# Altium PCB PCB1.PcbDoc
Units mm, origin at the board's own origin, x right, y up, seen from the top; angles counter-clockwise.
Board outline 80 x 78 mm, 2 copper layers (Top Layer, Bottom Layer), stack 3.066 mm thick; 12 components, 3 nets, 38 pads, 0 vias.
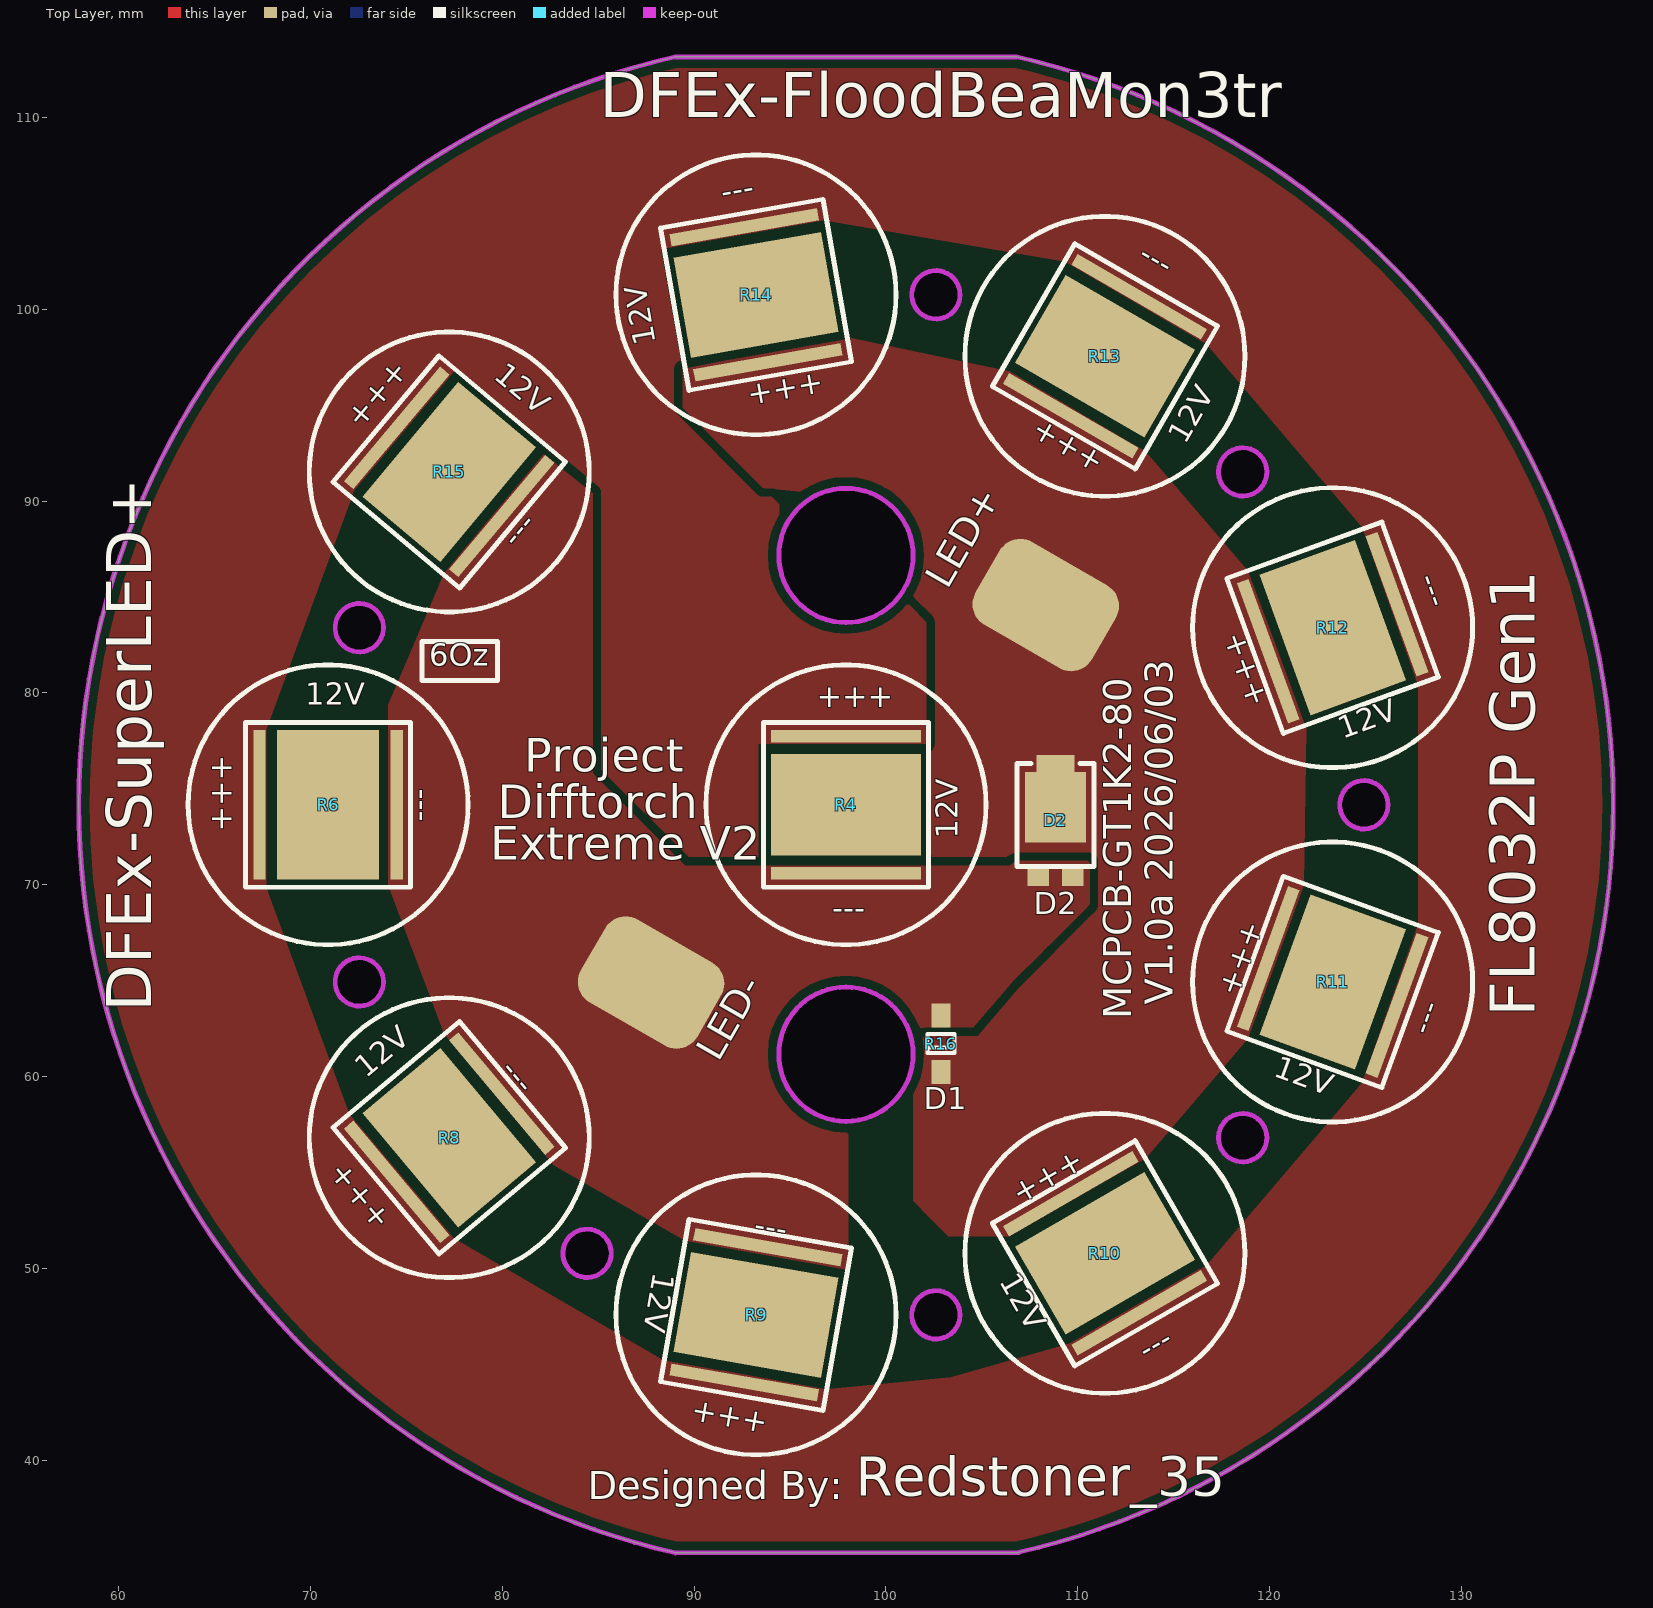
[diagram p0: Top Layer view]
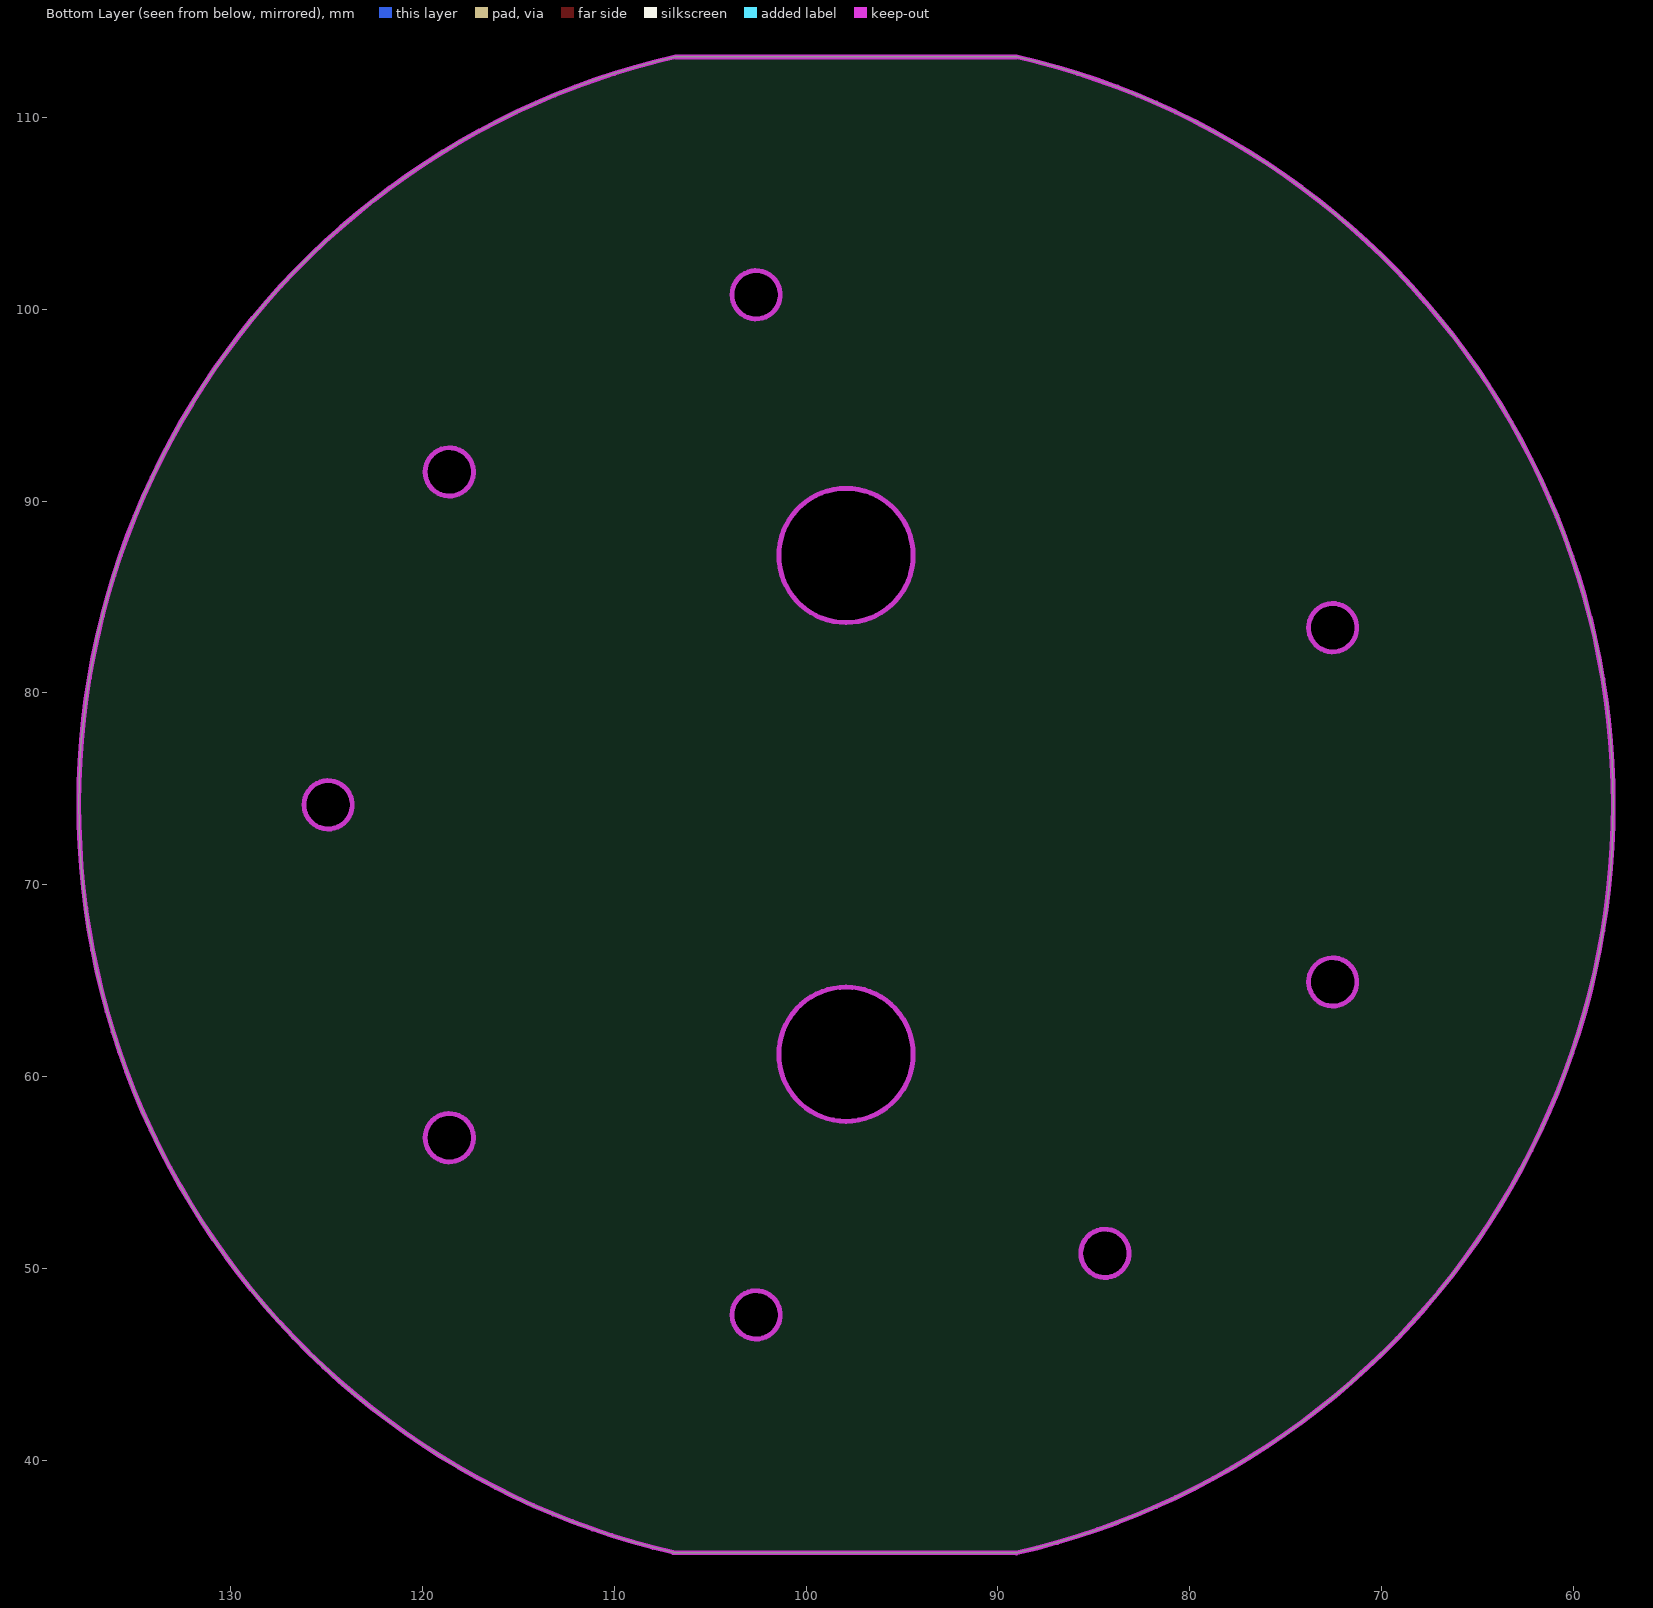
[diagram p1: Bottom Layer view, seen from below]
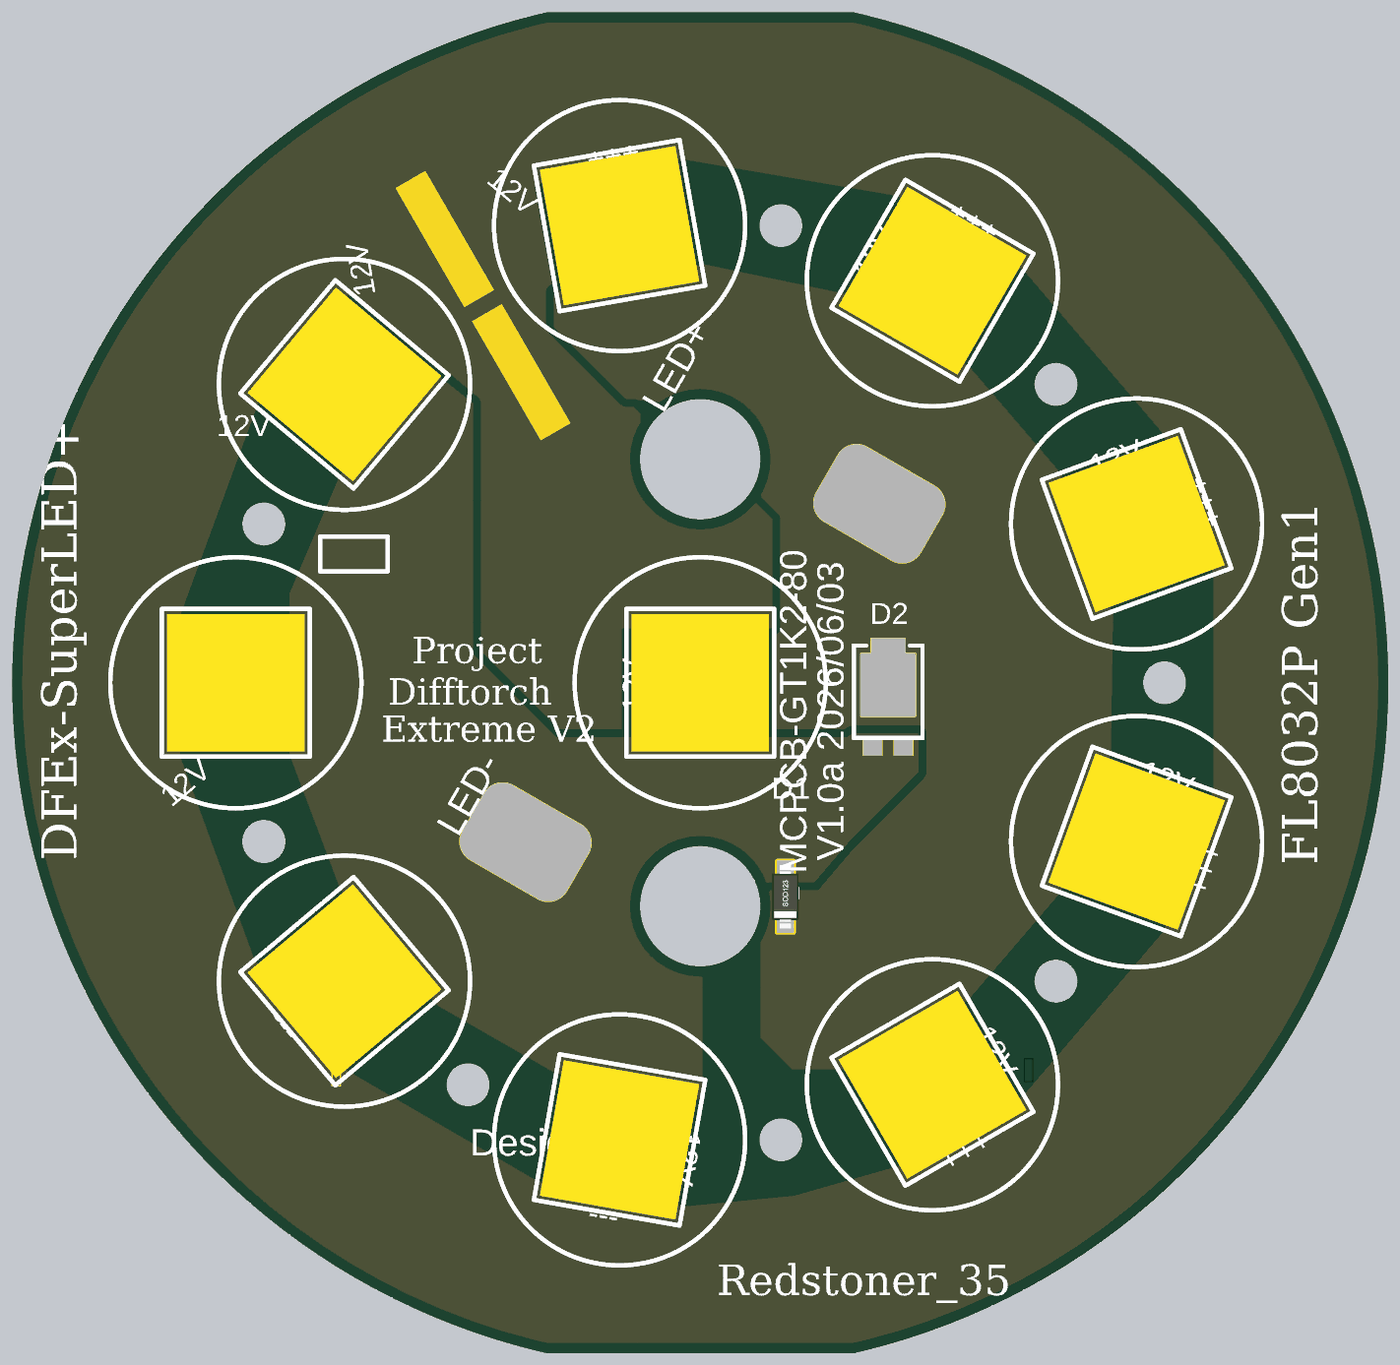
[diagram p2: 3D render of the assembled board from above, using the file's embedded part models]

## Layer stack, top to bottom
Top Solder: solder mask 0.0102, Solder Resist, Dk 3.5
Top Layer: signal copper 0.21
Dielectric 1: dielectric 2.82, FR-4, Dk 4.8
Bottom Layer: signal copper 0.0356
Bottom Solder: solder mask 0.0102, Solder Resist, Dk 3.5

## Board outline
89.025,35.169 cw(c97.919,74.168) 89.027,113.167 89.027,113.157 106.809,113.157 106.81,113.167 cw(c97.917,74.168) 106.93,35.197 106.93,35.179
cut-out: 83.167,50.785 ccw(c84.417,50.785) 84.417,49.535 ccw(c84.417,50.785) 85.667,50.785 ccw(c84.417,50.785) 84.417,52.035 ccw(c84.417,50.785)
cut-out: 101.356,47.578 ccw(c102.606,47.578) 102.606,46.328 ccw(c102.606,47.578) 103.856,47.578 ccw(c102.606,47.578) 102.606,48.828 ccw(c102.606,47.578)
cut-out: 117.35,56.813 ccw(c118.6,56.813) 118.6,55.563 ccw(c118.6,56.813) 119.85,56.813 ccw(c118.6,56.813) 118.6,58.063 ccw(c118.6,56.813)
cut-out: 123.667,74.168 ccw(c124.917,74.168) 124.917,72.918 ccw(c124.917,74.168) 126.167,74.168 ccw(c124.917,74.168) 124.917,75.418 ccw(c124.917,74.168)
cut-out: 117.35,91.523 ccw(c118.6,91.523) 118.6,90.273 ccw(c118.6,91.523) 119.85,91.523 ccw(c118.6,91.523) 118.6,92.773 ccw(c118.6,91.523)
cut-out: 101.356,100.758 ccw(c102.606,100.758) 102.606,99.508 ccw(c102.606,100.758) 103.856,100.758 ccw(c102.606,100.758) 102.606,102.008 ccw(c102.606,100.758)
cut-out: 72.545,82.153 cw(c72.545,83.403) 71.295,83.403 cw(c72.545,83.403) 72.545,84.653 cw(c72.545,83.403) 73.795,83.403 cw(c72.545,83.403)
cut-out: 94.417,87.168 ccw(c97.917,87.168) 97.917,83.668 ccw(c97.917,87.168) 101.417,87.168 ccw(c97.917,87.168) 97.917,90.668 ccw(c97.917,87.168)
cut-out: 94.417,61.168 ccw(c97.917,61.168) 97.917,57.668 ccw(c97.917,61.168) 101.417,61.168 ccw(c97.917,61.168) 97.917,64.668 ccw(c97.917,61.168)
cut-out: 71.285,64.933 ccw(c72.545,64.933) 72.545,63.673 ccw(c72.545,64.933) 73.805,64.933 ccw(c72.545,64.933) 72.545,66.193 ccw(c72.545,64.933)

## Design rules (kind name [scope] priority, off if disabled: settings)
Clearance [All] p1: gap=0.45
PolygonConnect [All] p1: connectstyle=Direct reliefconductorwidth=0.254 reliefentries=4 polygonreliefangle="90 Angle" airgapwidth=0.254
RoutingVias [All] p1: holewidth=0.711 width=1.27 viastyle="Through Hole" minholewidth=0.711 minwidth=1.27 maxholewidth=0.711 maxwidth=1.27
SolderMaskExpansion [All] p1: expansion=0.102
Width [All] p1: maxlimit=100 minlimit=0.45 preferedwidth=0.8
30 further rules are at their usual default settings.

## Components (designator, comment, footprint, x,y, rotation, side; value= is the part's Value field where it differs from the comment)
D2 "PT30L80SP" TO277 108.839,74.041 r0 top
R4 "5A 一次性慢熔" FL8032P 97.917,74.168 r90 top locked
R6 "5A 一次性慢熔" FL8032P 70.917,74.168 r0 top
R8 "5A 一次性慢熔" FL8032P 77.234,56.813 r40 top
R9 "5A 一次性慢熔" FL8032P 93.229,47.578 r80 top
R10 "5A 一次性慢熔" FL8032P 111.417,50.785 r120 top
R11 "5A 一次性慢熔" FL8032P 123.289,64.933 r160 top
R12 "5A 一次性慢熔" FL8032P 123.289,83.403 r200 top
R13 "5A 一次性慢熔" FL8032P 111.417,97.551 r240 top
R14 "5A 一次性慢熔" FL8032P 93.228,100.758 r280 top
R15 "5A 一次性慢熔" FL8032P 77.234,91.523 r320 top
R16 "5A 一次性慢熔" SOD-123 102.87,61.722 r90 top

## Footprints (in the part's own frame and the unit in brackets; to place one, negate y for a bottom-side part, rotate by r counter-clockwise, add the part's x,y. Pads: shape width x height; smd on the part's side, far side on the other; paste and mask are expansions set on the pad)
FL8032P [mm] "FL8032P 12V High Efficiency LED"
  rect 5.3x7.8 smd mask+0.03: 0(0,0)
  rect 0.65x7.8 smd mask+0.03: 1(-3.575,0) 2(3.575,0)
  silkscreen extent -4.3,-4.3 4.3,4.3, body extent -4,-4 4,4, height 0.93
SOD-123 [mm]
  rect 1.25x1 smd: 1(1.475,0) 2(-1.475,0)
  silkscreen extent -0.5,-0.7 0.5,0.7, body extent -1.85,-0.77 1.85,0.78, height 1.35
TO277 [mm]
  rect 3.2x3.7 smd mask+0.03: 1(0,0)
  rect 2x0.9 smd mask+0.03: 1(0,2.275)
  rect 1.1x0.9 smd mask+0.03: 2(-0.9,-3.65) 3(0.9,-3.65)
  silkscreen extent -2,-3.09 2,2.29, body extent -2.03,-3.05 2.03,2.29, height 1.1

## Free pads (board coordinates)
  rrect50% 5x7 smd rot 60 mask+0.03: 4(87.757,64.897) 4(108.331,84.582)

## Nets (pads, with @x,y where several pads share a name; then routed paths per layer and width w, separated by ;. In a path a pad name is that pad's centre, name@x,y a point inside that pad or via, vN(x,y) a via of type N, cw(c..) or ccw(c..) an arc to the next point about the centre after c; other vN are vias at no path point)
12V: R4.2 R6.1 R8.1 R9.1 R10.1 R11.1 R12.1 R13.1 R14.1 R15.1
24V: D2.1 pad.4@108.331,84.582 R10.2 R11.2 R12.2 R13.2 R14.2 R16.2
GND: D2.2 D2.3 pad.4@87.757,64.897 R4.1 R6.2 R8.2 R9.2 R15.2 R16.1
pads on no net: R4.0 R6.0 R8.0 R9.0 R10.0 R11.0 R12.0 R13.0 R14.0 R15.0

## Polygon pours and split planes (outlines as drawn)
24V on Top Layer "Component Side-No Net 1" (solid, remove dead copper, pour order 20): 93.644,90.678 99.981,90.008 100.838,83.82 102.616,69.596 108.585,69.342 106.172,92.837 101.219,95.885
GND on Top Layer "Component Side-No Net 1" (solid, remove dead copper, pour order 18): 96.901,66.548 109.601,66.675 108.585,60.579 94.615,61.722
12V on Top Layer "Component Side-No Net 1" (solid, remove dead copper, pour order 16): 109.601,46.101 103.378,44.323 96.866,43.694 91.313,44.704 90.805,35.179 117.475,35.052 116.459,50.038
12V on Top Layer "Component Side-No Net 1" (solid, remove dead copper, pour order 14): 109.601,46.101 116.713,50.165 124.841,59.69 127.762,67.945 127.762,80.391 124.841,88.646 116.713,98.171 109.347,102.489 96.739,104.642 92.837,108.839 94.742,117.094 126.492,121.793 148.082,108.331 144.018,67.056 131.572,34.671 109.601,29.845
12V on Top Layer "Component Side-No Net 1" (solid, remove dead copper, pour order 12): 72.263,90.551 67.691,78.105 67.691,69.85 72.009,58.039 77.47,51.562 88.392,45.212 96.901,43.688 96.901,35.179 72.517,35.433 59.944,50.8 55.372,68.199 54.356,92.583 59.055,105.537 76.327,100.965
12V on Top Layer "Component Side-No Net 1" (solid, remove dead copper, pour order 10): 102.108,77.343 102.108,83.693 99.182,86.619 94.449,86.619 94.449,89.828 89.408,94.869 89.408,96.774 88.265,103.124 96.774,104.648 96.774,115.443 81.407,114.681 71.247,105.156 64.008,99.568 63.373,98.552 63.881,97.282 64.77,96.647 72.263,90.551 77.597,96.901 83.439,92.075 84.963,90.805 84.709,75.819 89.535,70.993 93.345,70.993 93.345,77.343
24V on Top Layer "Component Side-No Net 1" (solid, pour order 8): 106.426,51.689 103.251,51.689 102.235,52.705 101.425,53.515 101.425,62.103 104.775,62.103 110.617,68.961 110.744,69.088 110.744,71.501 103.124,71.501 102.997,71.628 102.997,79.756 102.997,88.773 101.092,90.678 93.599,90.678 89.408,94.869 89.408,96.901 97.917,98.552 106.426,96.774 113.538,92.583 118.872,86.36 121.92,78.232 121.793,69.977 118.872,61.976 113.538,55.753
GND on Top Layer "Component Side-No Net 1" (solid, pour order 6): 98.298,70.993 106.426,70.993 106.807,71.247 110.617,71.247 110.617,68.961 110.363,68.707 104.902,63.246 101.425,63.246
GND on Top Layer "Component Side-No Net 1" (solid, pour order 4): 74.041,77.216 74.041,79.375 76.962,86.233 82.169,92.456 84.709,90.424 84.709,89.154 84.709,78.232 84.709,75.819 84.709,71.501 84.455,71.247 83.185,69.977 74.041,69.977
GND on Top Layer "Component Side-No Net 1" (solid, pour order 2): 98.044,49.911 98.044,57.531 98.192,57.679 97.917,57.953 97.917,64.679 98.897,64.679 100.584,62.992 100.838,63.246 101.981,63.246 101.981,70.866 101.854,70.993 95.377,70.993 89.535,70.993 83.312,77.216 82.423,78.105 74.041,78.105 74.041,69.977 76.962,62.23 82.677,55.372 89.535,51.435

## Keep-outs
Keep-Out Layer:
  circle w0.254: c102.606,100.758 r1.26
  circle w0.254: c118.6,91.523 r1.26
  circle w0.254: c124.917,74.168 r1.26
  circle w0.254: c118.6,56.813 r1.26
  circle w0.254: c102.606,47.578 r1.26
  circle w0.254: c84.417,50.785 r1.26
  circle w0.254: c72.545,64.933 r1.26
  circle w0.254: c72.545,83.403 r1.26
  circle w0.254: c97.917,61.168 r3.5
  circle w0.254: c97.917,87.168 r3.5
  lines w0.254: 89.025,35.169 cw(c97.919,74.168) 89.027,113.167 ; 89.025,35.179 106.93,35.179 ; 89.027,113.157 106.809,113.157 ; 106.81,113.167 cw(c97.917,74.168) 106.93,35.197

## Silkscreen, mask and mechanical layers (free items; w line width, h text height)
Top Overlay:
  circle w0.254: c97.917,74.168 r7.3
  circle w0.254: c77.234,91.523 r7.3
  circle w0.254: c93.229,100.758 r7.3
  circle w0.254: c111.417,97.551 r7.3
  circle w0.254: c123.289,83.403 r7.3
  circle w0.254: c123.289,64.933 r7.3
  circle w0.254: c111.417,50.785 r7.3
  circle w0.254: c93.228,47.578 r7.3
  circle w0.254: c77.234,56.813 r7.3
  circle w0.254: c70.917,74.168 r7.3
  circle w0.254: c70.917,74.168 r7.3
  lines w0.254: 75.819,80.645 79.756,80.645 79.756,82.677 75.819,82.677 75.819,80.645
  text "DFEx-FloodBeaMon3tr" at 85.09,109.22 h4
  text "---" at 91.567,105.156 h2 r10
  text "---" at 112.903,102.235 h2 r330
  text "12V" at 88.392,98.298 h2 r100
  text "12V" at 79.248,96.139 h2 r320
  text "+++" at 92.964,94.615 h2 r10
  text "+++" at 72.898,93.472 h2 r50
  text "+++" at 107.315,93.091 h2 r330
  text "12V" at 115.951,92.71 h2 r60
  text "---" at 81.026,87.249 h2 r50
  text "---" at 127.381,85.852 h2 r290
  text "LED+" at 103.632,85.09 h2.5 r60
  text "+++" at 117.221,82.804 h2 r290
  text "6Oz" at 76.2,81.026 h2
  text "12V" at 69.723,78.994 h2
  text "+++" at 96.393,78.867 h2
  text "12V" at 123.952,77.216 h2 r20
  text "Project" at 81.153,75.311 h3
  text "---" at 76.581,73.279 h2 r90
  text "Difftorch" at 79.756,72.898 h3
  text "+++" at 66.294,72.771 h2 r90
  text "12V" at 104.14,72.39 h2 r90
  text "Extreme V2" at 79.375,70.739 h3
  text "---" at 98.933,69.469 h2 r180
  text "+++" at 118.364,68.326 h2 r250
  text "D2" at 107.696,68.072 h2
  text "---" at 127.762,64.135 h2 r250
  text "V1.0a 2026/06/03" at 115.443,63.754 h2.5 r90
  text "DFEx-SuperLED+" at 62.484,63.373 h4 r90
  text "FL8032P Gen1" at 134.62,63.119 h4 r90
  text "MCPCB-GT1K2-80" at 113.284,62.992 h2.5 r90
  text "LED-" at 91.694,60.452 h2.5 r60
  text "---" at 81.915,59.817 h2 r130
  text "12V" at 120.015,59.69 h2 r340
  text "12V" at 73.152,59.563 h2 r40
  text "D1" at 101.981,57.912 h2
  text "+++" at 109.728,56.515 h2 r210
  text "+++" at 74.549,52.832 h2 r130
  text "---" at 94.996,52.705 h2 r170
  text "12V" at 87.503,49.911 h2 r260
  text "12V" at 105.537,49.149 h2 r300
  text "---" at 114.427,47.117 h2 r210
  text "+++" at 93.98,42.799 h2 r170
  text "Designed By:" at 84.455,37.465 h2.5
  text "Redstoner_35" at 98.425,37.465 h3.5
Top Solder:
  region: 90.378,89.265 86.378,96.193 84.646,95.193 88.646,88.265
  region: 85.933,97.012 81.933,103.94 80.201,102.94 84.201,96.012
  text "烫" at 75.184,103.251 h3
  text "烫" at 117.983,103.251 h3
  text "屯" at 116.586,41.656 h3
  text "屯" at 76.327,41.402 h3
Mechanical 6:
  circle w0.254: c102.606,100.758 r2.45
  circle w0.254: c118.6,91.523 r2.45
  circle w0.254: c124.917,74.168 r2.45
  circle w0.254: c118.6,56.813 r2.45
  circle w0.254: c102.606,47.578 r2.45
  circle w0.254: c84.417,50.785 r2.45
  circle w0.254: c72.545,83.403 r2.45
  circle w0.254: c72.545,64.933 r2.45